# EAGLE board ShittyAddonHat (EAGLE 9.1.3)
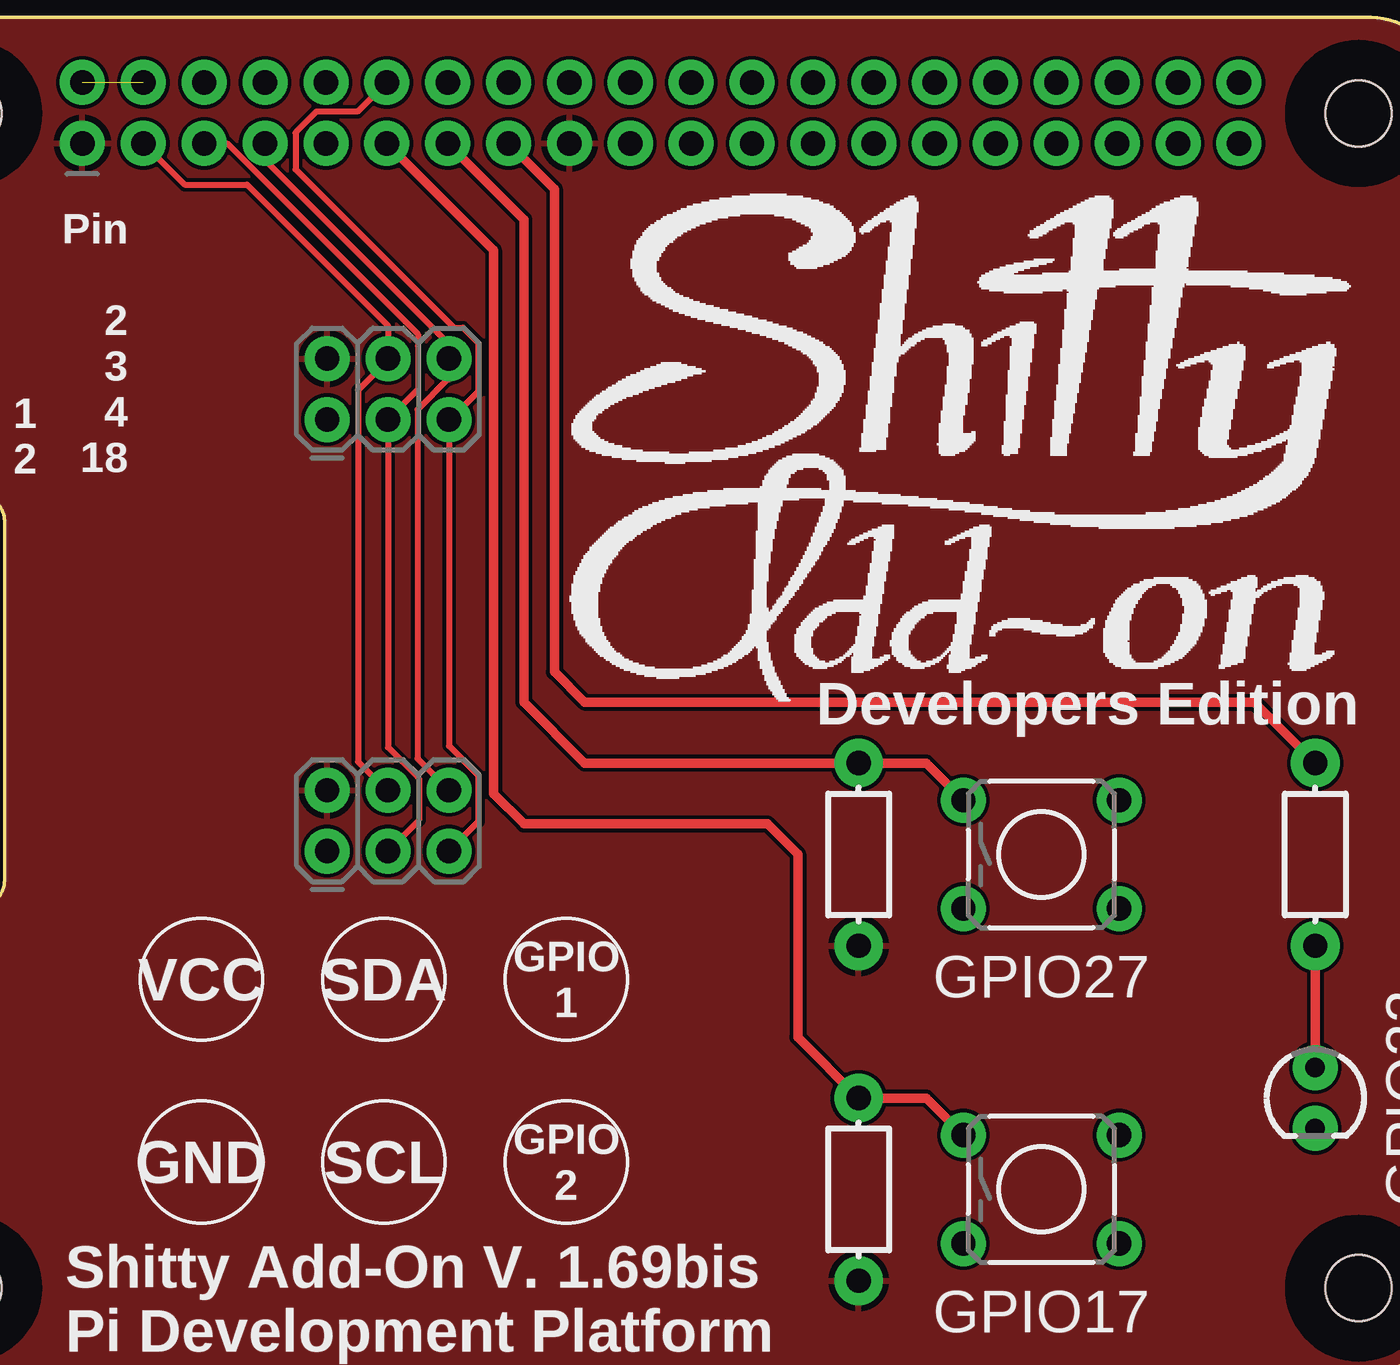
[diagram p0: board, top side]
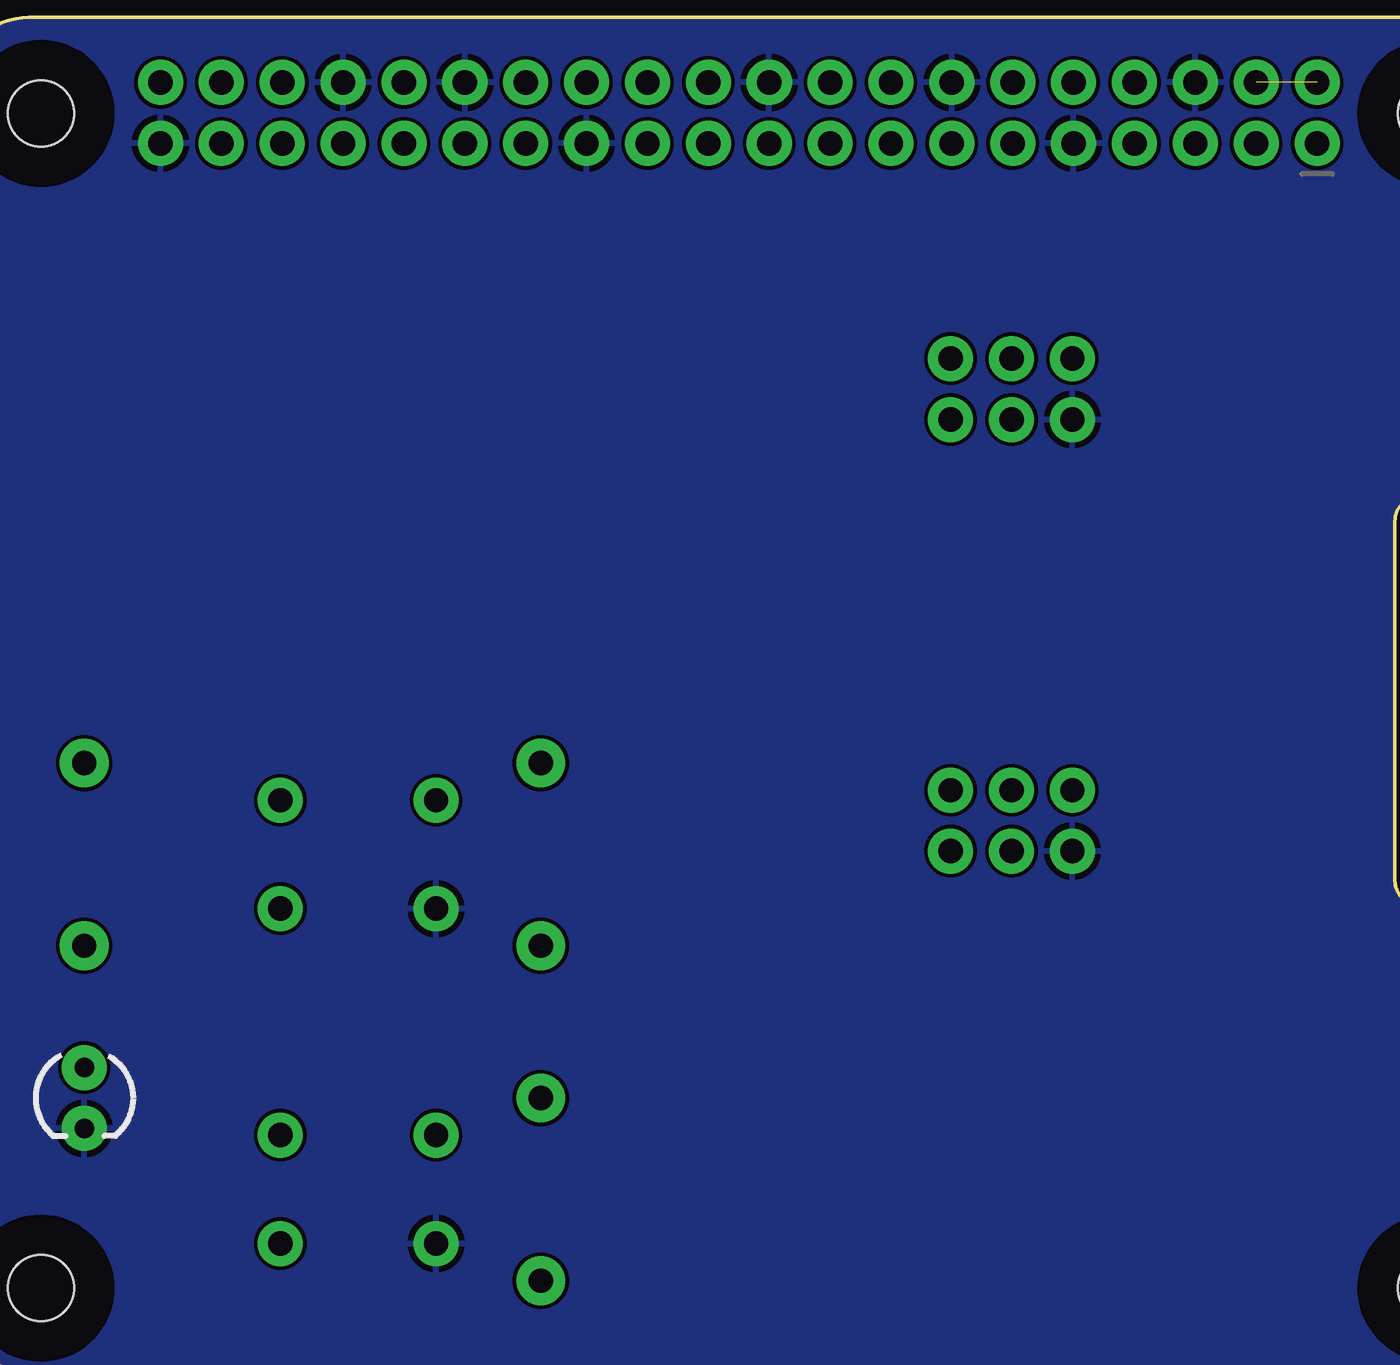
[diagram p1: board, bottom side, seen from below]

No outline drawn. Coordinates in mm, seen from the top.
Copper layers (1*16): Top 0.035mm / dielectric 1.5mm / Bottom 0.035mm
Design rules "default": minimum track width 6mil, minimum drill 0.35mm, track to track 6mil, track to pad 6mil, pad to pad 6mil, via to via 6mil, smd to smd 6mil, copper to edge 40mil, drill to drill 6mil, minimum pad ring 10mil, minimum via ring 8mil, stop-mask expansion 4mil, vias tented up to drill 0mil, thermal gap 10mil
Holes 2.75 mm at 3.5,3.5 3.5,52.5 61.5,3.5 61.5,52.5 3.5,3.5 61.5,3.5 61.5,52.5
tRestrict: area 0.5,49.5 to 6.5,55.5; area 0.5,0.5 to 6.5,6.5; area 58.5,0.5 to 64.5,6.5; area 58.5,49.5 to 64.5,55.5
bRestrict: area 0.5,49.5 to 6.5,55.5; area 0.5,0.5 to 6.5,6.5; area 58.5,0.5 to 64.5,6.5; area 58.5,49.5 to 64.5,55.5
Milling: 17 lines

## Footprints (pad centres in the part's own frame; a part is rotated, then mirrored left to right if it is on the bottom)
LED_3MM = drill 0.813 pad 1.88: A -1.27,0; K 1.27,0
2X3-NS = drill 1.016 pad 1.88: 1 -2.54,-1.27; 2 -2.54,1.27; 3 0,-1.27; 4 0,1.27; 5 2.54,-1.27; 6 2.54,1.27
2X20_NOSILK = drill 1.016 pad 1.88: 1 0,0; 2 0,2.54; 3 2.54,0; 4 2.54,2.54; 5 5.08,0; 6 5.08,2.54; 7 7.62,0; 8 7.62,2.54; 9 10.16,0; 10 10.16,2.54; 11 12.7,0; 12 12.7,2.54; 13 15.24,0; 14 15.24,2.54; 15 17.78,0; 16 17.78,2.54; 17 20.32,0; 18 20.32,2.54; 19 22.86,0; 20 22.86,2.54; 21 25.4,0; 22 25.4,2.54; 23 27.94,0; 24 27.94,2.54; 25 30.48,0; 26 30.48,2.54; 27 33.02,0; 28 33.02,2.54; 29 35.56,0; 30 35.56,2.54; 31 38.1,0; 32 38.1,2.54; 33 40.64,0; 34 40.64,2.54; 35 43.18,0; 36 43.18,2.54; 37 45.72,0; 38 45.72,2.54; 39 48.26,0; 40 48.26,2.54
AXIAL-0.3-KIT = drill 1.016 pad 2.032: P$1 -3.81,0; P$2 3.81,0
TACTILE_SWITCH_PTH_6.0MM = drill 1.016 pad 1.88: 1 -3.251,2.261; 2 3.251,2.261; 3 -3.251,-2.261; 4 3.251,-2.261

## Placement (x,y rotation side)
D1  [LED_3MM]  59.69,11.43 270 top
J1  [2X3-NS]  21,23 0 top
J2  [2X3-NS]  21,41 0 top
PI_GPIO  [2X20_NOSILK]  8.25,51.25 0 top
R1  10k  [AXIAL-0.3-KIT]  40.64,7.62 90 top
R2  10k  [AXIAL-0.3-KIT]  40.64,21.59 90 top
R3  22  [AXIAL-0.3-KIT]  59.69,21.59 270 top
S1  [TACTILE_SWITCH_PTH_6.0MM]  48.26,7.62 0 top
S2  [TACTILE_SWITCH_PTH_6.0MM]  48.26,21.59 0 top

## Library data of the parts
D1 = SparkFun-LED; PROD_ID: DIO-08794
J1 J2 PI_GPIO = SparkFun-Connectors
R1-R3 = SparkFun-Resistors; PROD_ID: RES-09435
S1 S2 = SparkFun-Switches; PROD_ID: SWCH-08441; SF_SKU: COM-00097

## Nets
5V: PI_GPIO.2 PI_GPIO.4
GND: D1.K J1.1 J2.1 PI_GPIO.6 PI_GPIO.9 PI_GPIO.14 PI_GPIO.20 PI_GPIO.25 PI_GPIO.30 PI_GPIO.34 PI_GPIO.39 S1.3 S2.3
GPIO4: J1.6 J2.6 PI_GPIO.7
GPIO5: PI_GPIO.29
GPIO6: PI_GPIO.31
GPIO7: PI_GPIO.26
GPIO8: PI_GPIO.24
GPIO9: PI_GPIO.21
GPIO10: PI_GPIO.19
GPIO11: PI_GPIO.23
GPIO12: PI_GPIO.32
GPIO13: PI_GPIO.33
GPIO16: PI_GPIO.36
GPIO17: PI_GPIO.11 R1.P$2 S1.1
GPIO18: J1.5 J2.5 PI_GPIO.12
GPIO19: PI_GPIO.35
GPIO20: PI_GPIO.38
GPIO21: PI_GPIO.40
GPIO22: PI_GPIO.15 R3.P$1
GPIO23: PI_GPIO.16
GPIO24: PI_GPIO.18
GPIO25: PI_GPIO.22
GPIO26: PI_GPIO.37
GPIO27: PI_GPIO.13 R2.P$2 S2.1
ID_SC: PI_GPIO.28
ID_SD: PI_GPIO.27
N$1: D1.A R3.P$2
RX: PI_GPIO.10
SCL: J1.3 J2.3 PI_GPIO.5
SDA: J1.4 J2.4 PI_GPIO.3
TX: PI_GPIO.8
VCC: J1.2 J2.2 PI_GPIO.1 PI_GPIO.17 R1.P$1 R2.P$1

## Tracks (layer width: path | path; a pad name or v marks a point on that pad's centre or on a via)
5V  (1 unrouted)
GND
  pour Bottom: 0,52 0,53.5 arc-90 3,56.5 62,56.5 arc-90 65,53.5 65,3 arc-90 62,0 3,0 arc-90 0,3 0,18.5 arc-90 1,19.5 4,19.5 arc90 5,20.5 5,35.5 arc90 4,36.5 0.25,36.5 arc-90 0,36.75
GPIO4
  Top 0.254: PI_GPIO.7 15.87,50.55 23.54,42.88 J2.6 23.54,41.4 23.49,41.4 22.23,40.14 22.23,25.59 J1.6
GPIO17
  Top 0.406: PI_GPIO.11 25.4,46.8 25.4,24.13 26.67,22.86 36.83,22.86 38.1,21.59 38.1,13.97 R1.P$2 43.46,11.43 S1.1
GPIO18
  Top 0.254: PI_GPIO.12 19.73,52.57 18.01,52.57 17.19,51.76 17.19,51.73 17.14,51.69 17.14,50.16 23.75,43.56 24.13,43.56 24.77,42.93 24.77,40.89 23.6,39.73 J2.5 23.54,26.12 24.77,24.89 24.77,22.95 J1.5
GPIO22
  Top 0.406: PI_GPIO.15 27.94,49.34 27.94,29.21 29.21,27.94 57.15,27.94 R3.P$1
GPIO27
  Top 0.406: S2.1 43.46,25.4 R2.P$2 29.21,25.4 26.67,27.94 26.67,48.07 PI_GPIO.13
N$1
  Top 0.406: R3.P$2 D1.A
SCL
  Top 0.254: J1.3 22.29,23.02 22.29,24.77 21,26.05 J2.3 21,39.75 22.25,41 22.25,42.8 22.25,43.28 14.28,51.25 PI_GPIO.5
SDA
  Top 0.254: J1.4 20.94,24.27 19.75,25.46 19.75,40.95 21,42.21 J2.4 21,43.64 15.11,49.53 12.51,49.53 PI_GPIO.3
VCC
  pour Top: 0,37 0,53 0,53.5 arc-90 3,56.5 62,56.5 arc-90 65,53.5 65,53 65,3 arc-90 62,0 61,0 3,0 arc-90 0,3 0,18 0,18.5 arc-90 1,19.5 4,19.5 arc90 5,20.5 5,20.75 5,35.5 arc90 4,36.5 0.5,36.5 0.25,36.5 arc-90 0,36.75

## Text on the board
tPlace: Pin / / 2 / 3 / 4 / 18 | Func / / SDA / SCL / GPIO 1 / GPIO 2 | Developers Edition | GPIO27 | VCC | SDA | GPIO / 1 | GPIO22 | GND | SCL | GPIO / 2 | GPIO17 | Shitty Add-On V. 1.69bis / Pi Development Platform